# Altium PCB neck_v2.PcbDoc
Units mm, origin at the board's own origin, x right, y up, seen from the top; angles counter-clockwise.
Board outline 18 x 18 mm, 2 copper layers (Top Layer, Bottom Layer); 7 components, 8 nets, 34 pads, 72 vias.
Unrouted connection lines stored in the file: 3.
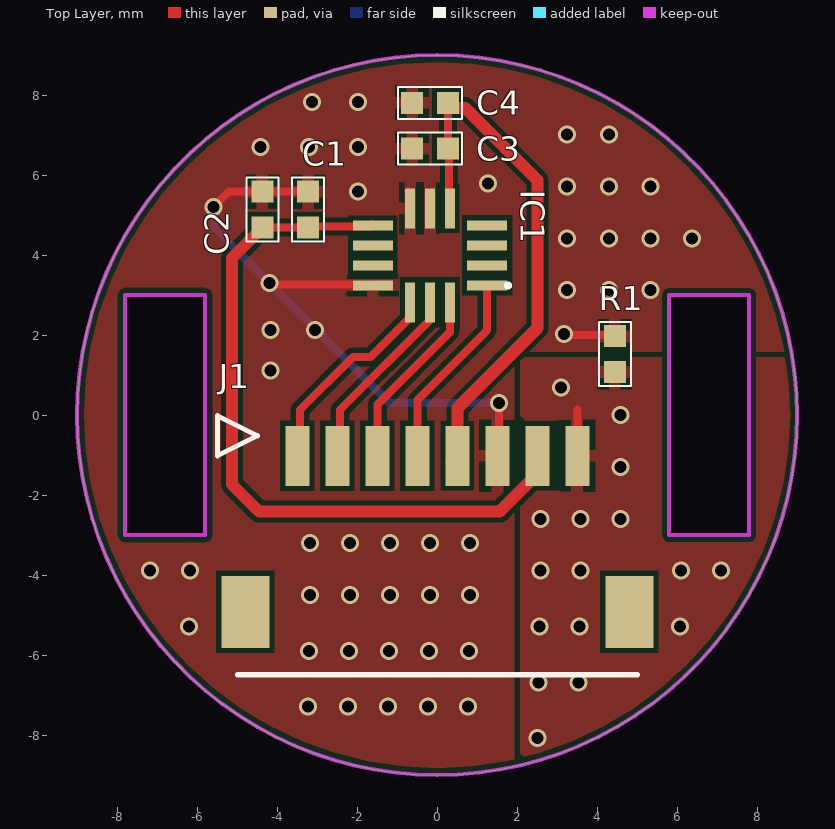
[diagram p0: Top Layer view]
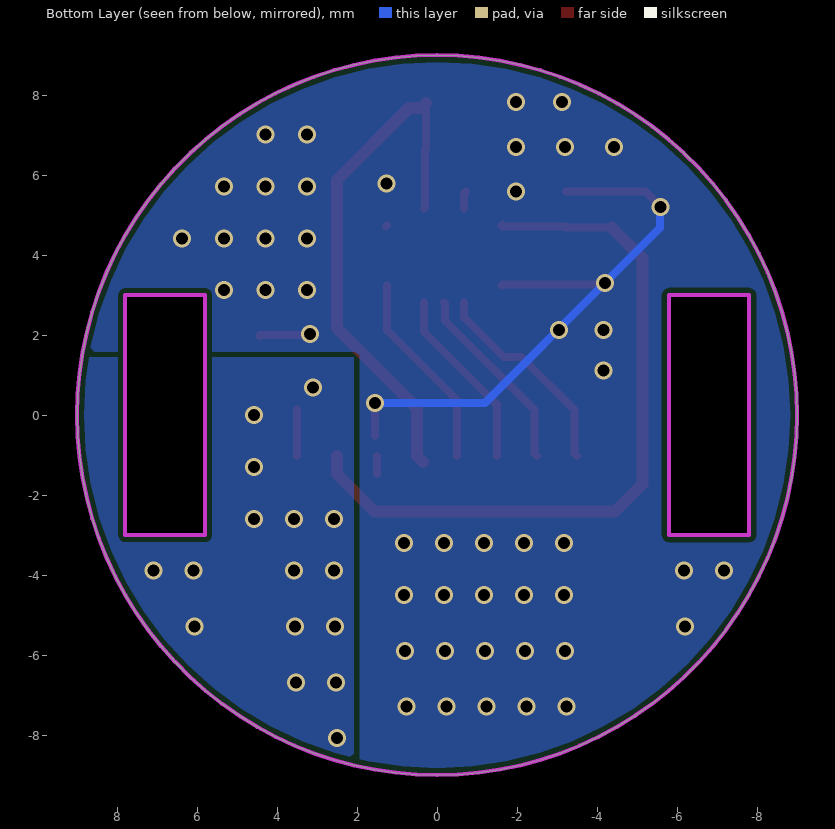
[diagram p1: Bottom Layer view, seen from below]
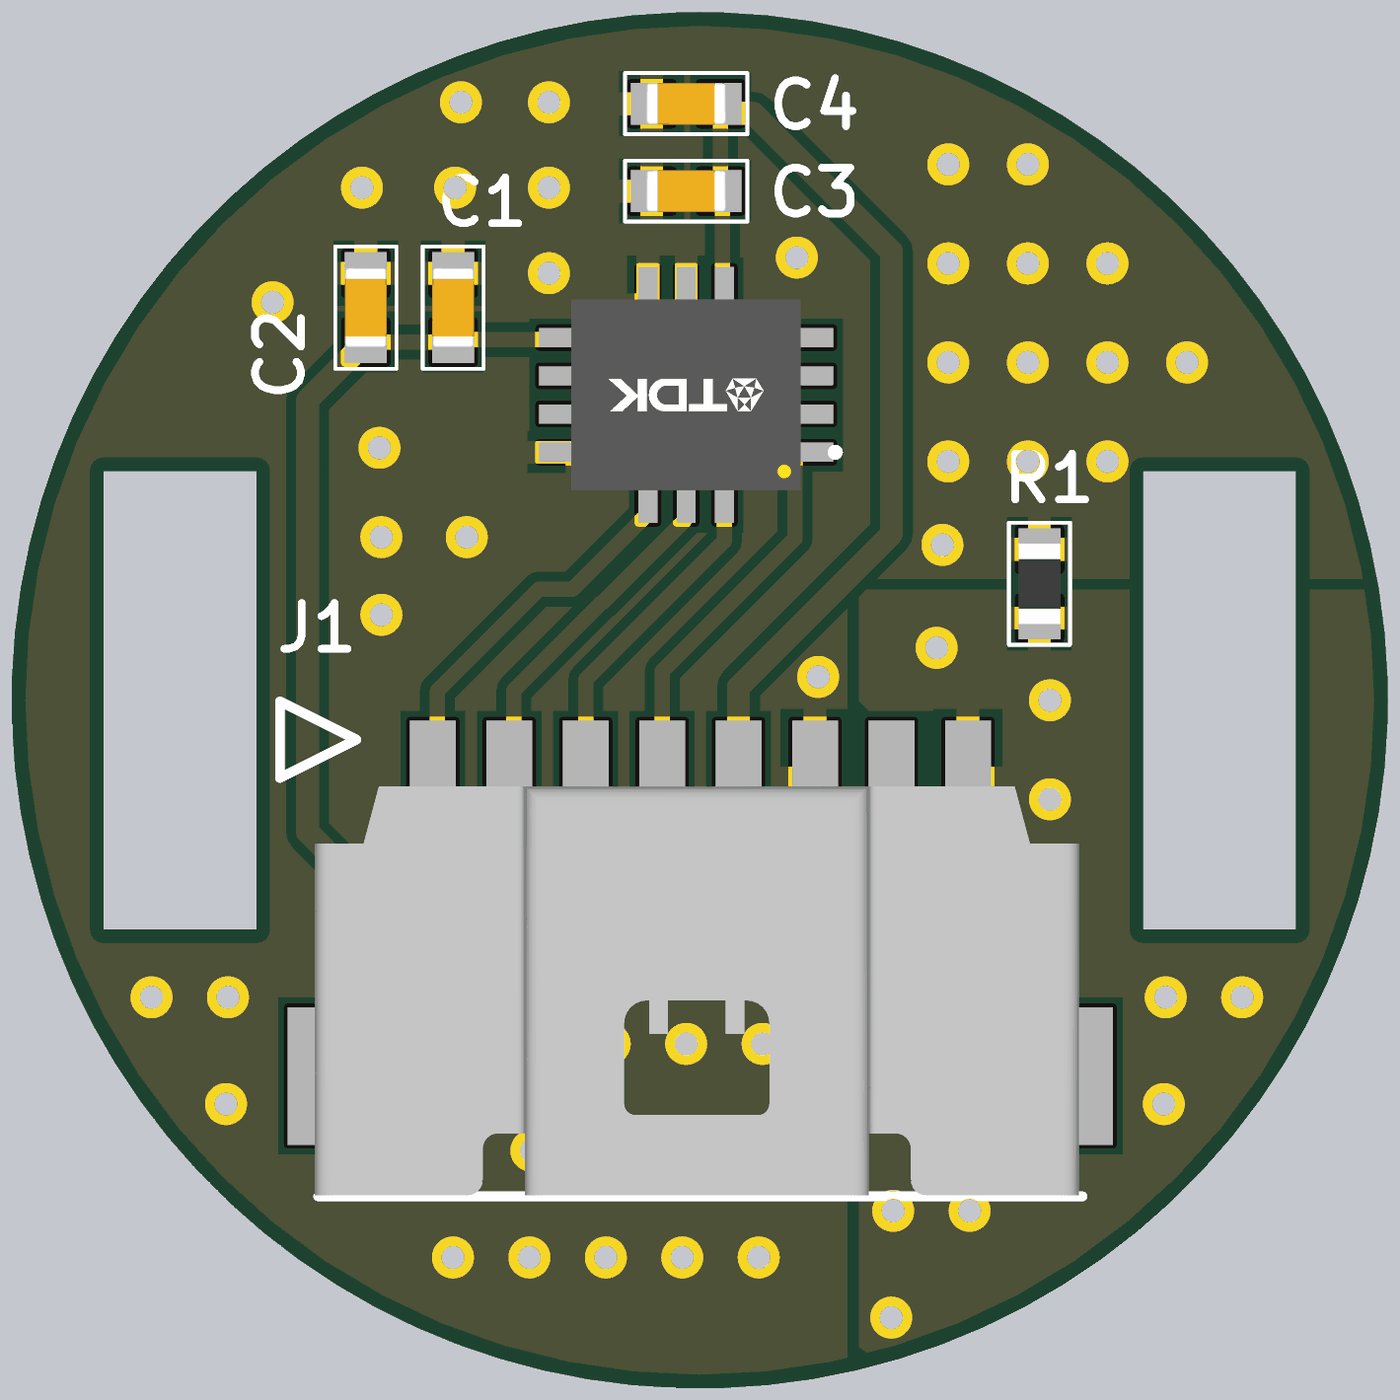
[diagram p2: 3D render of the assembled board from above, using the file's embedded part models]

## Layer stack, top to bottom
Top Solder: solder mask 0.0102, Solder Resist, Dk 3.5
Top Layer: signal copper 0.0356
Dielectric 1: dielectric 0.32, FR-4, Dk 4.8
Bottom Layer: signal copper 0.0356
Bottom Solder: solder mask 0.0102, Solder Resist, Dk 3.5

## Board outline
-9,0 ccw(c0,0) 0,-9 ccw(c0,0) 9,0 ccw(c0,0) 0,9 ccw(c0,0)
cut-out: -7.8,-3 -7.8,3 -5.8,3 -5.8,-3
cut-out: 5.8,-3 5.8,3 7.8,3 7.8,-3

## Design rules (kind name [scope] priority, off if disabled: settings)
Clearance "Poor Polygon clearance" [All] p1 off: gap=0.2 ignorepadtopadclearanceinfootprint=FALSE except(0: Text-Hole; 0.13: Text-Text) // hsdgt
Clearance "minimum clearance" [All] p2: gap=0.125 ignorepadtopadclearanceinfootprint=FALSE except(0.13: Text-Text) // hsdgt
HoleSize [All] p1: absolutevalues=TRUE maxlimit=5 minlimit=0.2 maxpercent=80.000 minpercent=20.000
PlaneClearance [All] p1: clearance=0.125
PlaneConnect [All] p1: planeconnectstyle=Relief reliefexpansion=0.2 reliefentries=4 reliefconductorwidth=0.3 reliefairgap=0.15
PolygonConnect [All] p1: thpad.connectstyle=Relief thpad.reliefconductorwidth=0.3 thpad.reliefentries=4 thpad.polygonreliefangle="90 Angle" thpad.airgapwidth=0.15 smdpad.connectstyle=Relief smdpad.reliefconductorwidth=0.3 smdpad.reliefentries=4 smdpad.polygonreliefangle="90 Angle" smdpad.airgapwidth=0.15 via.connectstyle=Direct via.reliefconductorwidth=0.3 via.reliefentries=4 via.polygonreliefangle="90 Angle" via.airgapwidth=0.15
RoutingVias "0.3 - 0.45 Via" [All] p1: holewidth=0.3 width=0.45 viastyle="Through Hole" minholewidth=0.2 minwidth=0.2 maxholewidth=5 maxwidth=5
RoutingVias "0.4 - 0.55 Via" [All] p2: holewidth=0.4 width=0.55 viastyle="Through Hole" minholewidth=0.2 minwidth=0.2 maxholewidth=5 maxwidth=5
SilkToSilkClearance [All] p1: silktosilkclearance=0.13
SolderMaskExpansion [All] p1: expansion=0.05 istentingtop=FALSE
Width "0.4 Line" [All] p1 off: maxlimit=5 minlimit=0.125 preferedwidth=0.4 minimp=50.000000 maximp=50.000000 favimp=50.000000
Width "0.2 Line" [All] p2: maxlimit=5 minlimit=0.125 preferedwidth=0.2 minimp=50.000000 maximp=50.000000 favimp=50.000000
Width "0.254 Line" [All] p3 off: maxlimit=5 minlimit=0.125 preferedwidth=0.254 minimp=50.000000 maximp=50.000000 favimp=50.000000
26 further rules are at their usual default settings.

## Components (designator, comment, footprint, x,y, rotation, side; value= is the part's Value field where it differs from the comment)
C1 "100nF" CAP_1005 -3.226,5.137 r270 top
C2 "2.2uF" CAP_1005 -4.369,5.137 r270 top value=100nF
C3 "10nF" CAP_1005 -0.178,6.661 r0 top value=100nF
C4 "100nF" CAP_1005 -0.178,7.804 r0 top
IC1 "IIM-42652" IIM42652 -0.178,3.994 r180 top
J1 "2035590807" 2035590807 0.008,-1.016 r0 top
R1 "0" RES_1005 4.445,1.524 r90 top value=10k

## Footprints (in the part's own frame and the unit in brackets; to place one, negate y for a bottom-side part, rotate by r counter-clockwise, add the part's x,y. Pads: shape width x height; smd on the part's side, far side on the other; paste and mask are expansions set on the pad)
2035590807 [mm]
  rect 0.6x1.5 smd: 1(-3.5,0) 2(-2.5,0) 3(-1.5,0) 4(-0.5,0) 5(0.5,0) 6(1.5,0) 7(2.5,0) 8(3.5,0)
  rect 1.2x1.8 smd: 9(-4.8,-3.9) 10(4.8,-3.9)
  silkscreen extent -5.5,-5.48 5,1, body extent -5.05,-5.46 4.95,0.44, height 3
CAP_1005 [mm] "Chip Capacitor, 2-Leads, Body 1.05x0.55mm"
  rect 0.55x0.55 smd mask+0.05: 1(-0.45,0) 2(0.45,0)
  silkscreen extent -0.8,-0.4 0.8,0.4, body extent -0.53,-0.28 0.53,0.28, height 0.55
IIM42652 [mm]
  rect 1x0.25 smd: 1(-1.425,0.75) 2(-1.425,0.25) 3(-1.425,-0.25) 4(-1.425,-0.75) 8(1.425,-0.75) 9(1.425,-0.25) 10(1.425,0.25) 11(1.425,0.75)
  rect 0.25x1 smd: 5(-0.5,-1.175) 6(0,-1.175) 7(0.5,-1.175) 12(0.5,1.175) 13(0,1.175) 14(-0.5,1.175)
  silkscreen extent -2,0.7 -1.9,0.8, body extent -1.5,-1.25 1.5,1.25, height 0.91
RES_1005 [mm] "Chip Resistor, 2-Leads, Body 1.05x0.55mm"
  rect 0.55x0.55 smd mask+0.05: 1(-0.45,0) 2(0.45,0)
  silkscreen extent -0.8,-0.4 0.8,0.4, body extent -0.53,-0.28 0.53,0.28, height 0.4

## Part data
C1 C2 C3 C4: library part "CAP 1005", "1005(Metric) smd ceramic capacitor", Case Code (Imperial)=0402, Case Code (Metric)=1005
IC1: "Integrated Circuit", Manufacturer_Name=TDK, Mouser Part Number=410-IIM-42652, Arrow Part Number=IIM-42652, Arrow Price/Stock=https://www.arrow.com/en/products/iim-42652/invensense?region=nac, Datasheet Link=https://product.tdk.com/system/files/dam/doc/product/sensor/mortion-inertial/imu/data_sheet/ds-000401-iim-42652.pdf, Height=0.97mm, Manufacturer_Part_Number=IIM-42652, Mouser Price/Stock=https://www.mouser.co.uk/ProductDetail/TDK-InvenSense/IIM-42652?qs=CiayqK2gdcJdwMEsK7YW9Q%3D%3D
J1: "Connector", Manufacturer_Name=Molex, Datasheet Link=https://www.molex.com/pdm_docs/sd/2035590207_sd.pdf, Height=3.2mm, Manufacturer_Part_Number=2035590807
R1: library part "RES 1005", "1005(Metric) smd resistor", Case Code (Imperial)=0402, Case Code (Metric)=1005

## Via types
v1: diameter 0.45, hole 0.3, Top Layer to Bottom Layer, 72 vias

## Nets (pads, with @x,y where several pads share a name; then routed paths per layer and width w, separated by ;. In a path a pad name is that pad's centre, name@x,y a point inside that pad or via, vN(x,y) a via of type N, cw(c..) or ccw(c..) an arc to the next point about the centre after c; other vN are vias at no path point)
AGND: J1.8 R1.1 | length 1.2
  Top Layer w0.2: J1.8 3.508,0.137
  other v1: 2.505,-8.077 2.531,-6.68 3.531,-6.68 3.531,-6.68 2.556,-5.283 3.556,-5.283 3.556,-5.283 6.071,-5.283 6.071,-5.283 2.581,-3.886 3.581,-3.886 3.581,-3.886 6.096,-3.886 6.096,-3.886 7.096,-3.886 2.581,-2.591 3.581,-2.591 4.581,-2.591 4.581,-1.295 4.581,-1.295 4.581,0 4.581,0 3.099,0.686
GND: C1.1 C2.1 C3.1 C4.1 IC1.6 IC1.7 IC1.11 J1.6 R1.2 | length 17.7
  Top Layer w0.2: v1(-5.588,5.207) -5.208,5.587 C2.1 C1.1 ; v1(-4.191,3.302) -4.158,3.269 -1.629,3.269 IC1.11 ; IC1.7@-0.72,5.587 -0.678,5.544 IC1.7 ; J1.6@1.508,-1.466 J1.6 ; J1.6@1.549,-0.517 v1(1.549,0.305) ; v1(3.175,2.032) 3.204,2.003 4.416,2.003 R1.2
  Bottom Layer w0.2: v1(-5.588,5.207) -5.571,5.19 -5.571,4.682 v1(-4.191,3.302) -1.194,0.305 v1(1.549,0.305) v1@1.549,0.406
  other v1: -3.229,-7.29 -2.229,-7.29 -1.229,-7.29 -0.229,-7.29 0.771,-7.29 -3.203,-5.893 -2.203,-5.893 -1.203,-5.893 -0.203,-5.893 0.797,-5.893 -6.198,-5.283 -3.178,-4.496 -2.178,-4.496 -1.178,-4.496 -0.178,-4.496 0.822,-4.496 -7.172,-3.886 -6.172,-3.886 -3.178,-3.2 -2.178,-3.2 -1.178,-3.2 -0.178,-3.2 0.822,-3.2 -4.166,1.118 -4.166,2.134 -3.048,2.134 3.251,3.124 4.293,3.124 5.334,3.124 3.251,4.42 4.293,4.42 5.334,4.42 6.375,4.42 -1.973,5.587 3.251,5.715 4.293,5.715 5.334,5.715 1.27,5.791 -4.42,6.706 -3.2,6.706 -1.973,6.706 3.251,7.01 4.293,7.01 -3.124,7.823 -1.973,7.823
NetIC1_1: IC1.1 J1.4 | length 5
  Top Layer w0.2: J1.4 -0.492,0.378 1.247,2.117 IC1.1
NetIC1_12: IC1.12 J1.1 | length 5.3
  Top Layer w0.2: J1.1 -3.432,-0.956 -3.432,0.126 -2.104,1.454 -1.667,1.454 -0.678,2.444 IC1.12
NetIC1_13: IC1.13 J1.2 | length 4.8
  Top Layer w0.2: J1.2 -2.432,-0.956 -2.432,0.126 -1.282,1.276 -1.278,1.276 -0.203,2.35 -0.203,2.793 IC1.13
NetIC1_14: IC1.14 J1.3 | length 4.6
  Top Layer w0.2: J1.3 -1.492,0.267 0.322,2.081 IC1.14
VCC: C1.2 C2.2 IC1.8 J1.7 | length 18.3
  Top Layer w0.2: C2.2 C1.2 -3.194,4.719 -1.629,4.719 IC1.8 IC1.8@-1.629,4.769
  Top Layer w0.3: C2.2 -5.131,3.925 -5.131,-1.727 -4.445,-2.413 1.561,-2.413 2.508,-1.466 J1.7
VDDIO: C3.2 C4.2 IC1.5 J1.5 | length 13.6
  Top Layer w0.2: C4.2 C3.2 0.297,6.636 0.297,5.195 IC1.5
  Top Layer w0.3: C4.2 0.397,7.679 0.703,7.679 2.508,5.874 2.508,2.178 0.508,0.178 J1.5 J1.5@0.358,-1.166
pads on no net: IC1.2 IC1.3 IC1.4 IC1.9 IC1.10 J1.9 J1.10
copper on no net: | length 0
  Top Layer w0.2: 1.247,4.744 1.272,4.719

## Polygon pours and split planes (outlines as drawn)
GND on Top Layer "Bottom Layer-No Net 1" (solid, remove dead copper, pour order 19): -8.898,0 ccw(c0,0) 1.93,-8.686 1.93,1.524 8.767,1.524 ccw(c0,0) 0,8.898 ccw(c0,0)
AGND on Top Layer "AGND_L01_P017" (solid, remove dead copper, pour order 17): 8.883,1.448 cw(c0,0) 2.083,-8.756 2.083,1.448
AGND on Bottom Layer "AGND_L02_P015" (solid, remove dead copper, pour order 15): 8.883,1.448 cw(c0,0) 2.083,-8.756 2.083,1.448
GND on Bottom Layer "Bottom Layer-No Net 1" (solid, remove dead copper, pour order 16): -8.898,0 ccw(c0,0) 1.93,-8.686 1.93,1.524 8.767,1.524 ccw(c0,0) 0,8.898 ccw(c0,0)

## Keep-outs
Keep-Out Layer:
  circle w0.1: c0,0 r9
  lines w0.1: -7.8,-3 -7.8,3 -5.8,3 -5.8,-3 -7.8,-3 ; 5.8,-3 5.8,3 7.8,3 7.8,-3 5.8,-3